# EAGLE board plantshield_huzzah (EAGLE 9.6.1)
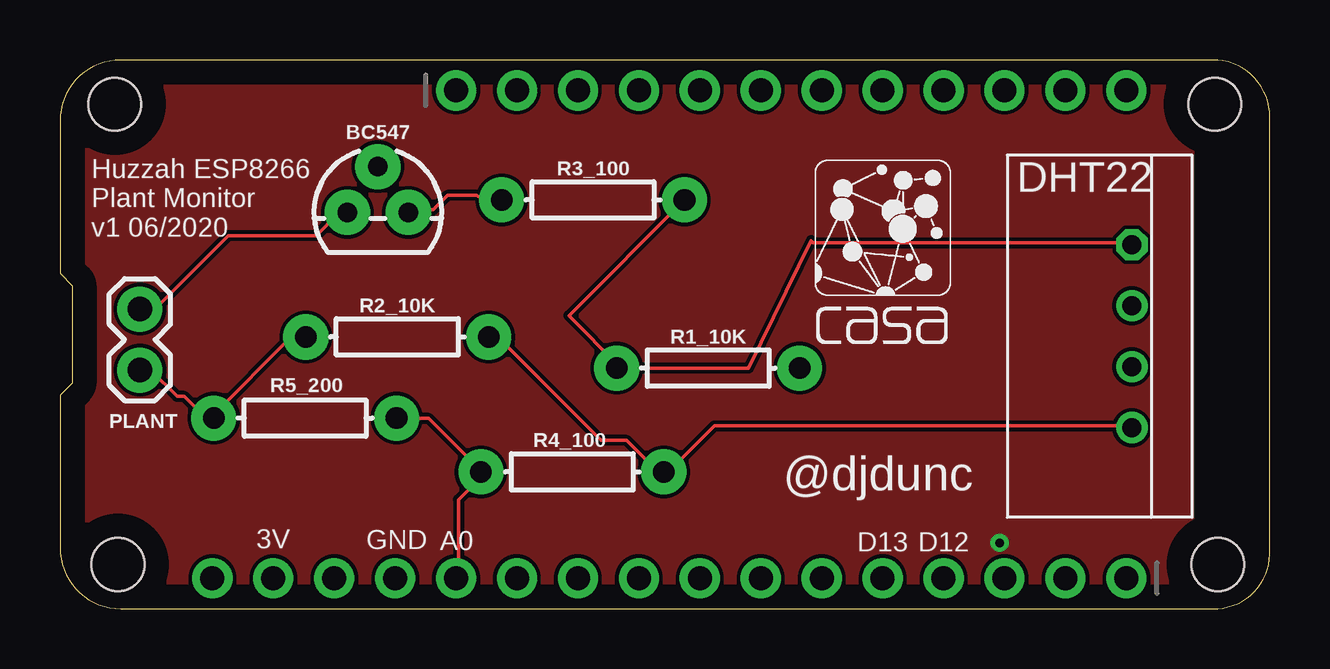
[diagram p0: board, top side]
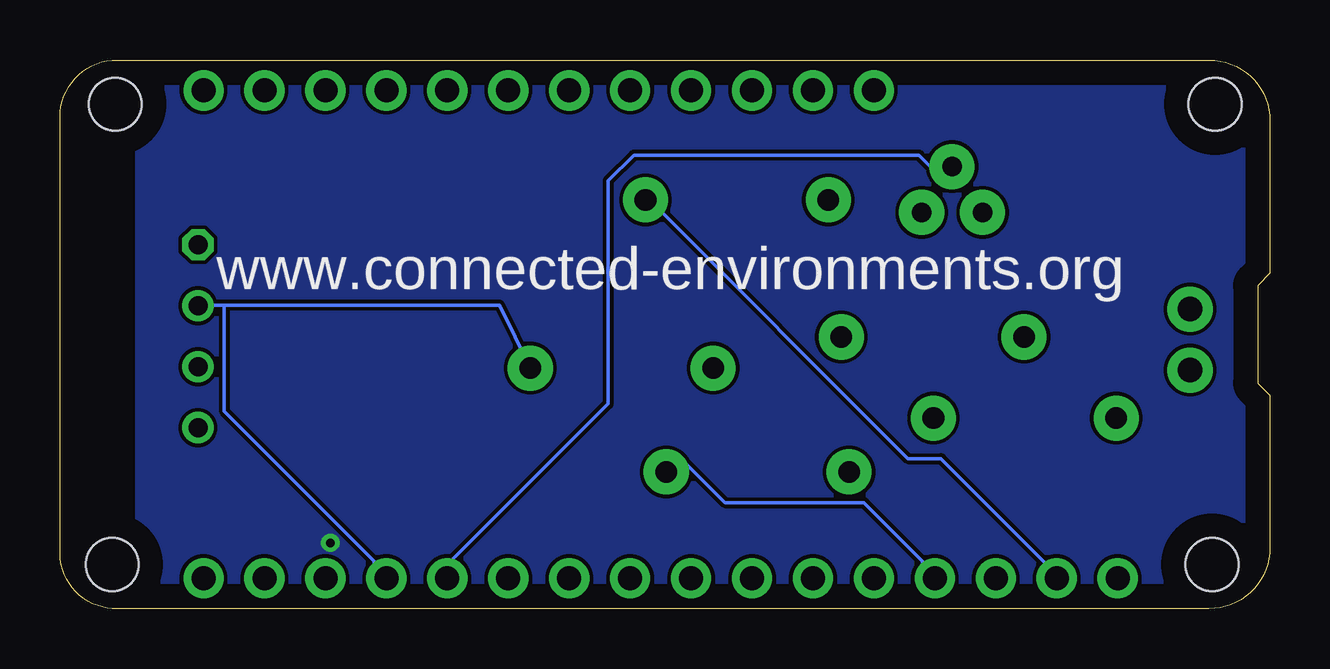
[diagram p1: board, bottom side, seen from below]

Size 50.43 x 22.86 mm. Coordinates in mm from the lower left corner, seen from the top.
Outline: 2.54,0 48.26,0 arc90 50.42,2.48 50.42,20.26 arc90 48.26,22.86 2.54,22.86 arc90 0,20.32 0,13.97 0.51,13.46 0.51,9.4 0,8.89 0,2.54 arc90 2.54,0
Copper layers (1*16): Top 0.035mm / dielectric 1.5mm / Bottom 0.035mm
Design rules "default": minimum track width 6mil, minimum drill 0.35mm, track to track 6mil, track to pad 6mil, pad to pad 6mil, via to via 6mil, smd to smd 6mil, copper to edge 40mil, drill to drill 6mil, minimum pad ring 10mil, minimum via ring 8mil, stop-mask expansion 4mil, vias tented up to drill 0mil, thermal gap 10mil
Holes 2.2 mm at 48.26,1.84 48.13,21.02 2.41,1.84 2.29,21.02

## Footprints (pad centres in the part's own frame; a part is rotated, then mirrored left to right if it is on the bottom)
TO-92 = drill 0.813 pad 1.88: 1 -1.27,0; 2 0,1.905; 3 1.27,0
RHT03_DHT-22 = drill 0.8: DATA -1.27,0; GND 3.81,0; NULL 1.27,0 | drill 0.8 octagon: VDD -3.81,0
1X16_ROUND = drill 1 pad 1.676: 1 -19.05,0; 2 -16.51,0; 3 -13.97,0; 4 -11.43,0; 5 -8.89,0; 6 -6.35,0; 7 -3.81,0; 8 -1.27,0; 9 1.27,0; 10 3.81,0; 11 6.35,0; 12 8.89,0; 13 11.43,0; 14 13.97,0; 15 16.51,0; 16 19.05,0
1X12_ROUND = drill 1 pad 1.676: 1 -13.97,0; 2 -11.43,0; 3 -8.89,0; 4 -6.35,0; 5 -3.81,0; 6 -1.27,0; 7 1.27,0; 8 3.81,0; 9 6.35,0; 10 8.89,0; 11 11.43,0; 12 13.97,0
1X02 = drill 1.016 pad 1.88: 1 0,0; 2 2.54,0
AXIAL-0.3 = drill 0.9 pad 1.88: P$1 -3.81,0; P$2 3.81,0

## Placement (x,y rotation side)
BC547  200mA/40V  [TO-92]  13.25,16.51 0 top
DHT22  [RHT03_DHT-22]  44.68,11.35 270 top
JP2  [1X16_ROUND]  25.4,1.27 180 top
JP4  [1X12_ROUND]  30.48,21.59 0 top
PLANT  [1X02]  3.33,9.94 90 top
R1_10K  10k  [AXIAL-0.3]  27.02,10.02 0 top
R2_10K  10k  [AXIAL-0.3]  14.06,11.32 0 top
R3_100  100  [AXIAL-0.3]  22.22,17.03 0 top
R4_100  100  [AXIAL-0.3]  21.36,5.7 180 top
R5_200  [AXIAL-0.3]  10.22,7.94 180 top

## Library data of the parts
BC547 = SparkFun-DiscreteSemi; PROD_ID: TRANS-08447
DHT22 = RHT03_DHT-22_AM2302; PROD_ID: SEN-10167
JP2 JP4 = microbuilder
PLANT = SparkFun-Connectors
R1_10K R2_10K = SparkFun-Resistors; PROD_ID: RES-12183
R3_100 R4_100 = SparkFun-Resistors; PROD_ID: RES-12181
R5_200 = SparkFun-Resistors

## Nets
N$1: BC547.2 JP2.5
N$2: DHT22.DATA JP2.4 R1_10K.P$2
N$3: BC547.3 R3_100.P$1
N$4: BC547.1 PLANT.2
N$5: JP2.12 R4_100.P$2 R5_200.P$1
N$6: DHT22.GND JP2.13 R2_10K.P$2 R4_100.P$1
N$7: PLANT.1 R2_10K.P$1 R5_200.P$2
N$8: DHT22.VDD JP2.15 R1_10K.P$1 R3_100.P$2

## Tracks (layer width: path | path; a pad name or v marks a point on that pad's centre or on a via)
GND1  (via drill 0.35)
  other vias: 39.17,2.74
  pour Top: 0,23.48 0,0 47.18,0 47.18,23.48
  pour Bottom: -0.13,0.25 47.18,-0.02 47.18,23.48 0,23.48
N$1
  Bottom 0.152: JP2.5 34.29,1.83 27.58,8.53 27.58,17.83 26.52,18.9 14.63,18.9 14.17,18.44 13.26,18.44 BC547.2
N$2
  Bottom 0.152: 43.59,12.65 44.65,12.65 DHT22.DATA | 43.59,12.65 32.12,12.65 R1_10K.P$2 | 43.59,12.65 43.59,8.23 37.34,1.98 37.34,1.83 36.88,1.37 JP2.4
N$3
  Top 0.152: BC547.3 14.63,16.61 15.54,16.61 16.15,17.22 17.37,17.22 17.64,17.03 R3_100.P$1
N$4
  Top 0.152: PLANT.2 3.35,12.5 3.96,12.5 7.01,15.54 10.67,15.54 11.58,16.46 11.89,16.46 BC547.1
N$5
  Top 0.152: JP2.12 16.61,1.37 16.61,4.54 17.24,5.17 17.24,5.7 R4_100.P$2 17.15,5.7 17.15,6.14 15.37,7.92 14.17,7.92 R5_200.P$1
N$6
  Top 0.152: DHT22.GND 44.65,7.62 27.28,7.62 25.36,5.7 R4_100.P$1 24.86,5.78 23.62,7.01 22.55,7.01 18.29,11.28 17.98,11.28 R2_10K.P$2
  Bottom 0.152: JP2.13 14.02,1.37 14.48,1.83 14.48,1.98 16.92,4.42 22.71,4.42 24.62,6.34 R4_100.P$1
N$7
  Top 0.152: 6.4,8.08 5.94,8.08 5.18,8.84 4.88,8.84 3.81,9.91 3.35,9.91 PLANT.1 | 6.4,8.08 9.6,11.28 10.21,11.28 R2_10K.P$1 | 6.4,8.08 R5_200.P$2
N$8
  Top 0.152: DHT22.VDD 44.65,15.24 31.39,15.24 31.3,15.33 28.7,10.02 R1_10K.P$1 23.29,10.1 21.21,12.21 R3_100.P$2
  Bottom 0.152: JP2.15 9.3,1.68 9.3,1.83 13.72,6.25 15.09,6.25 25.91,17.07 R3_100.P$2

## Text on the board
tPlace: Huzzah ESP8266 / Plant Monitor / v1 06/2020 | @djdunc | 3V | GND | A0 | D13 | D12
bPlace: www.connected-environments.org